# Altium PCB LM35.PcbDoc
Units mil, origin at the board's own origin, x right, y up, seen from the top; angles counter-clockwise.
Board outline 455 x 350 mil, 2 copper layers (Top Layer, Bottom Layer); 2 components, 7 nets, 6 pads, 0 vias.
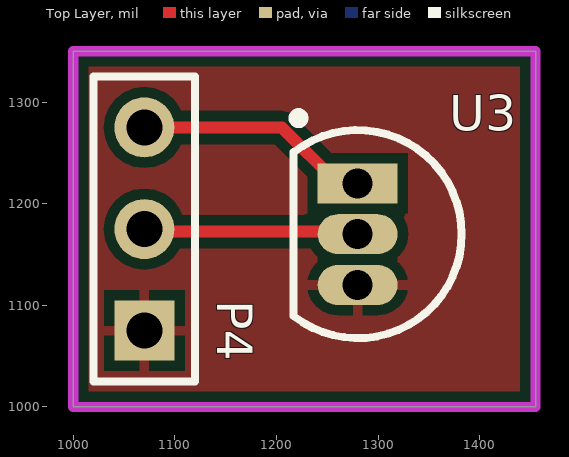
[diagram p0: Top Layer view]
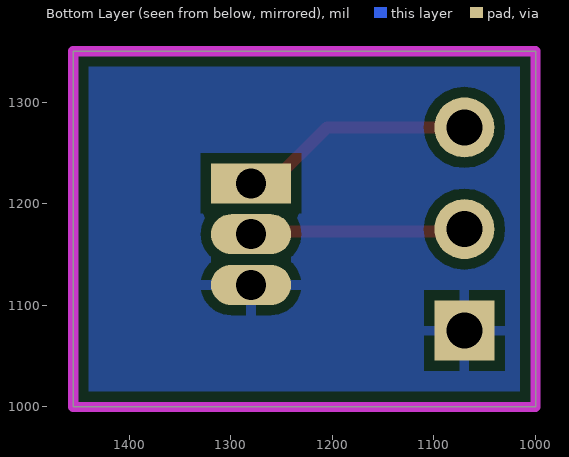
[diagram p1: Bottom Layer view, seen from below]

## Layer stack, top to bottom
Top Solder: solder mask 0.4, Solder Resist, Dk 3.5
Top Layer: signal copper 1.4
Dielectric 1: dielectric 12.6, FR-4, Dk 4.8
Bottom Layer: signal copper 1.4
Bottom Solder: solder mask 0.4, Solder Resist, Dk 3.5

## Board outline
1000,1000 1455,1000 1455,1350 1000,1350

## Design rules (kind name [scope] priority, off if disabled: settings)
Clearance [All] p1: gap=10 ignorepadtopadclearanceinfootprint=FALSE except(0: Arc-Hole Track-Hole SMDPad-Hole THPad-Hole Via-Hole Fill-Hole Poly-Hole Region-Hole Text-Hole; 8: SMDPad-SMDPad)
MinimumSolderMaskSliver [All] p1 off: minsoldermaskwidth=10
PolygonConnect [All] p1: connectstyle=Relief reliefconductorwidth=10 reliefentries=4 polygonreliefangle="90 Angle" airgapwidth=10
RoutingVias [All] p1: holewidth=28 width=50 viastyle="Through Hole" minholewidth=28 minwidth=50 maxholewidth=28 maxwidth=50
SilkToSilkClearance [All] p1 off: silktosilkclearance=10
SolderMaskExpansion [All] p1: expansion=4
Width [All] p1: maxlimit=20 minlimit=10 preferedwidth=12 minimp=50.000000 maximp=50.000000 favimp=50.000000
28 further rules are at their usual default settings.

## Components (designator, comment, footprint, x,y, rotation, side; value= is the part's Value field where it differs from the comment)
P4 "Header 3" HDR1X3 1070,1075 r90 top
U3 "LM35DZ/LFT1" Z03A 1280,1170 r180 top

## Footprints (in the part's own frame and the unit in brackets; to place one, negate y for a bottom-side part, rotate by r counter-clockwise, add the part's x,y. Pads: shape width x height; smd on the part's side, far side on the other; paste and mask are expansions set on the pad)
HDR1X3 [mm] "Connector; Header; 3 Position"
  rect 1.5x1.5 hole 0.9: 1(0,0)
  round 1.5 hole 0.9: 2(2.54,0) 3(5.08,0)
  silkscreen extent -1.27,-1.27 6.35,1.27
Z03A [mm] "TO, Flat Index; 3 In-Line, Axial Leads; Body Dia. 5mm; Leads 0.55 x 0.50 mm (max)"
  rect 2x1 hole 0.75: 1(0,-1.27)
  oval 2x1 hole 0.75: 2(0,0) 3(0,1.27)
  silkscreen extent -2.6,-3.02 1.6,2.6, body extent -2.6,-2.61 1.6,2.61, height 5.2

## Part data
P4: "Header, 3-Pin", LatestRevisionDate=17-Jul-2002, LatestRevisionNote="Re-released for DXP Platform.", Publisher="Altium Limited"
U3: "IC SENSOR PREC CENT TEMP TO92-3", Manufacturer="Texas Instruments", Package / Case="TO-226-3, TO-92-3 (TO-226AA)", Sensing Temperature="0°C ~ 100°C", Supplier Device Package=TO-92-3, Supplier Part Number 1=296-35151-ND, Voltage - Supply="4 V ~ 30 V", Accuracy=±0.6°C, Category="Sensors, Transducers", ComponentLink1Description=http://www.ti.com/lit/ds/symlink/lm35.pdf, ComponentLink1URL=http://www.ti.com/lit/ds/symlink/lm35.pdf, Manufacturer Part Number=LM35DZ/LFT1, Output Type="Linear Voltage", Packaging=Bulk, Pricing 1="1=1.57, 10=1.392, 25=1.2572, 100=1.1001, 250=0.96536, 500=0.8531, 1000=0.6735, 2500=0.6286, 5000=0.59717 (USD)", RoHS="RoHS Compliant", Stock 1=630, Supplier 1=Digi-Key

## Nets (pads, with @x,y where several pads share a name; then routed paths per layer and width w, separated by ;. In a path a pad name is that pad's centre, name@x,y a point inside that pad or via, vN(x,y) a via of type N, cw(c..) or ccw(c..) an arc to the next point about the centre after c; other vN are vias at no path point)
3V3: 
5V: P4.3 U3.1 | length 232.8
  Top Layer w12: P4.3 1205.32,1275 1260.32,1220 U3.1
A1: P4.2 U3.2 | length 212.1
  Top Layer w12: P4.2 1072.5,1172.5 1277.5,1172.5 U3.2
A3: 
A4: 
A5: 
GND: P4.1 U3.3

## Polygon pours and split planes (outlines as drawn)
GND on Top Layer "Top Layer-GND" (solid, pour order 0): 1000.97,1335 1455,1335 1455,1002.74 1004.58,1002.74
GND on Bottom Layer "Bottom Layer-GND" (solid, pour order 2): 1000,1350 1445,1350 1445,1000 1000,1000

## Keep-outs
Keep-Out Layer:
  the board outline again, w10